# EAGLE board aps_batt_board (EAGLE 4.13)
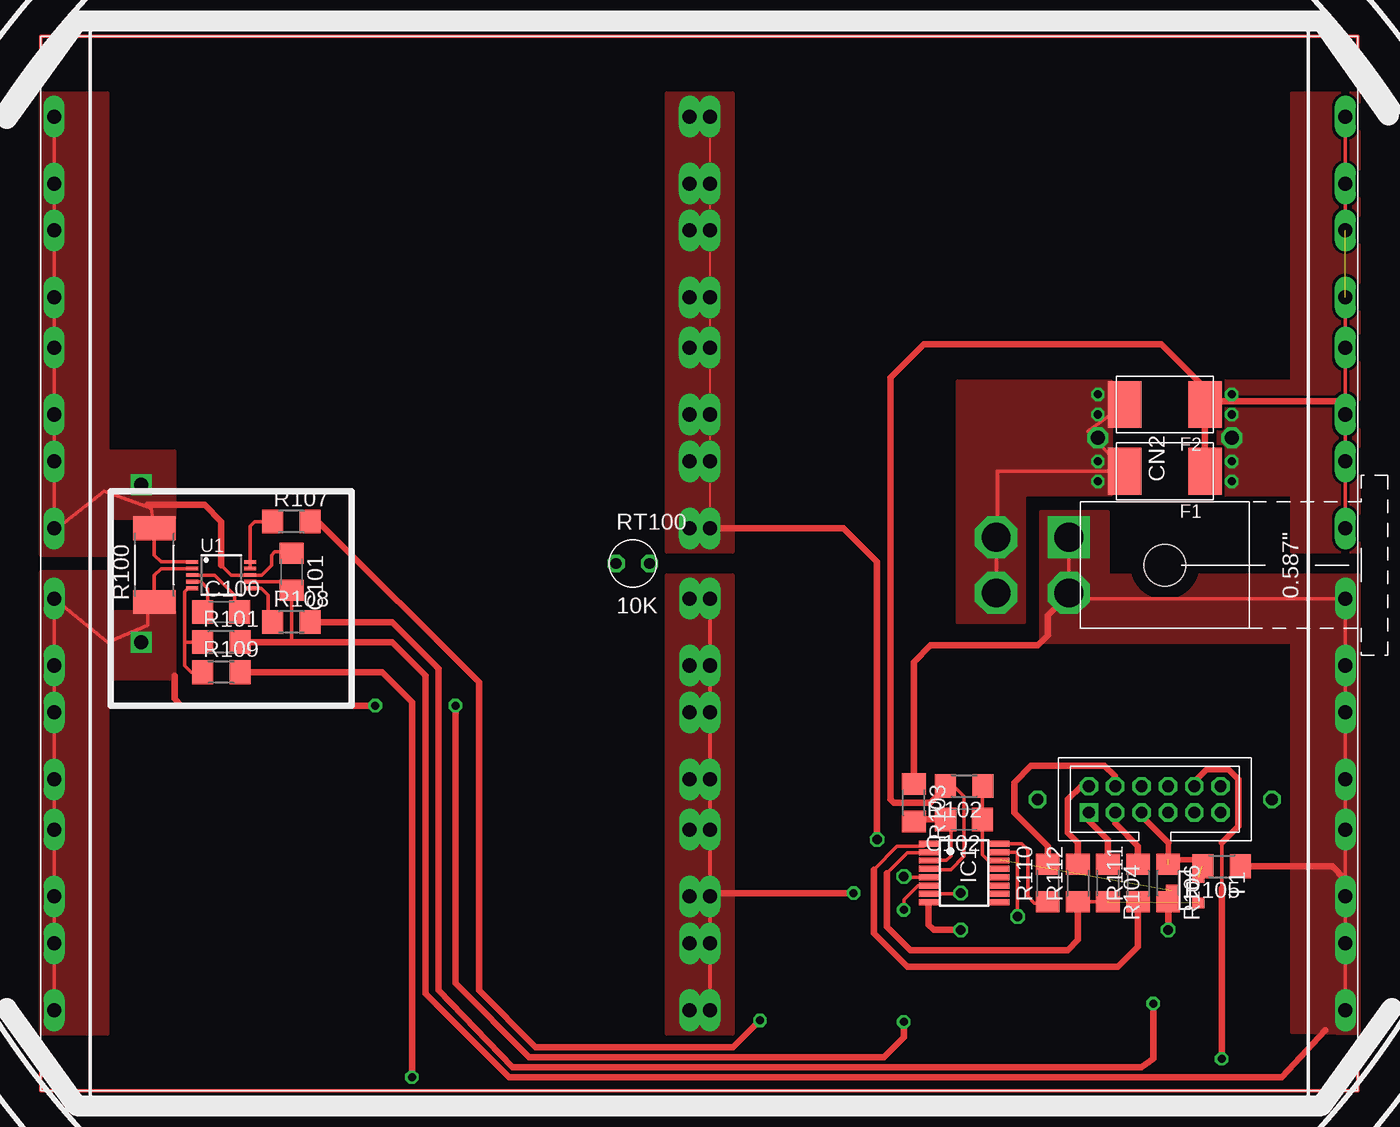
[diagram p0: board, top side]
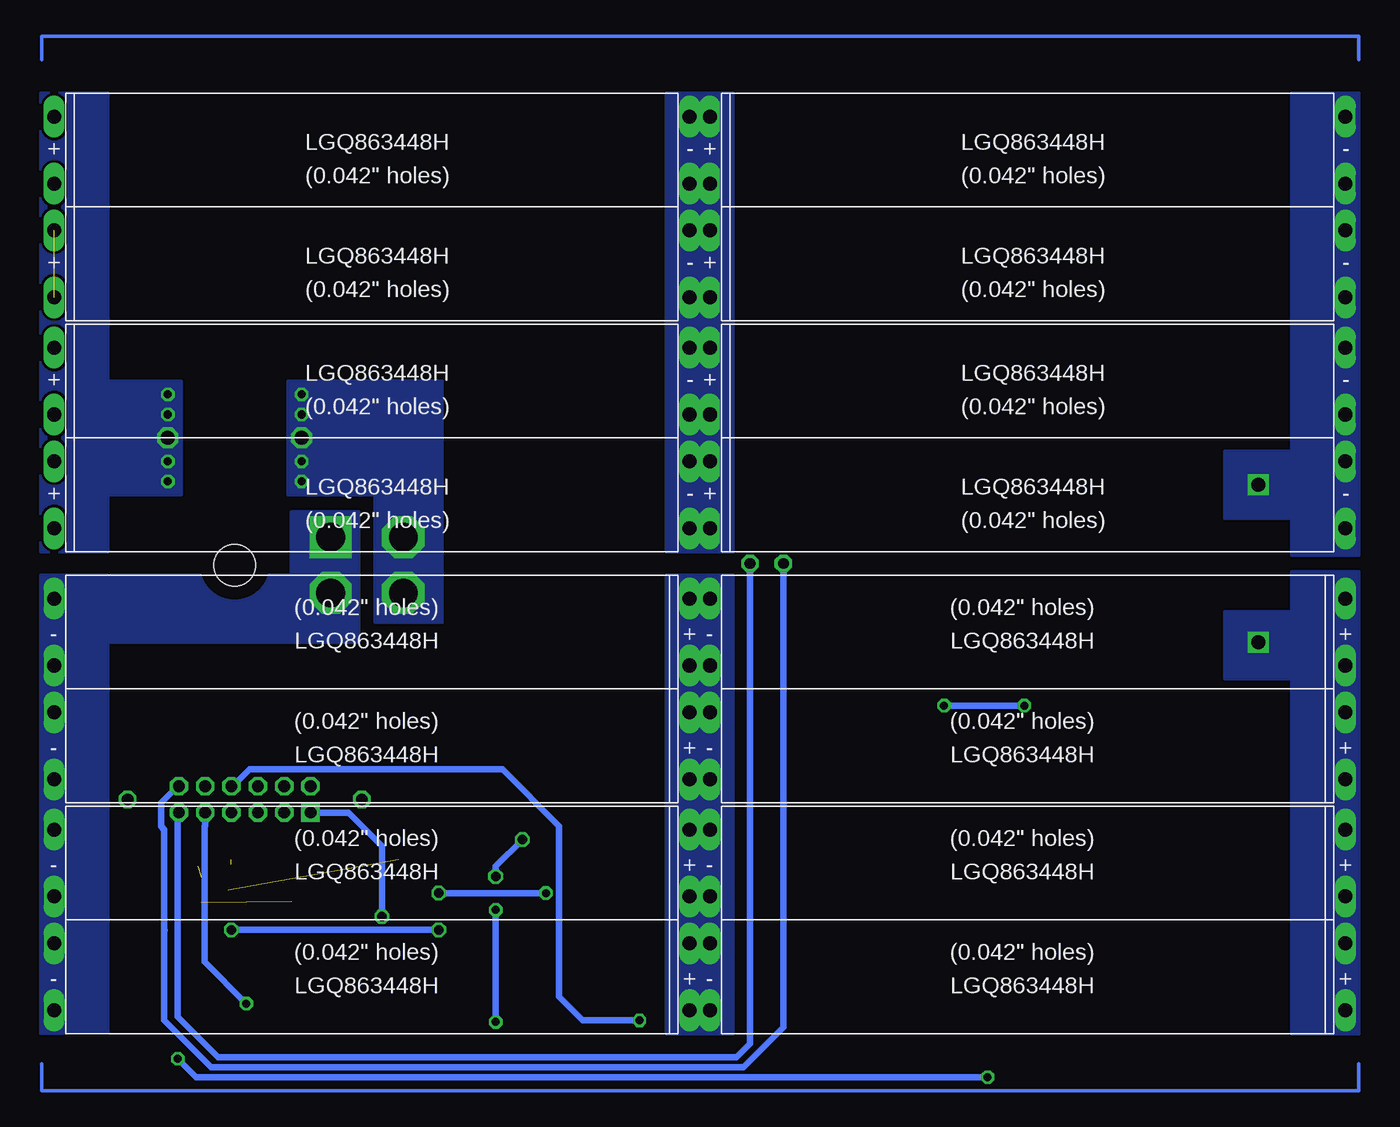
[diagram p1: board, bottom side, seen from below]

No outline drawn. Coordinates in mm, seen from the top.
Copper layers (1*16): Top 0.035mm / dielectric 1.5mm / Bottom 0.035mm
Design rules "default": minimum track width 10mil, minimum drill 24mil, track to track 8mil, track to pad 8mil, pad to pad 8mil, via to via 8mil, smd to smd 8mil, copper to edge 40mil, drill to drill 8mil, minimum pad ring 10mil, minimum via ring 8mil, stop-mask expansion 4mil, vias tented up to drill 0mil, thermal gap 10mil

## Footprints (pad centres in the part's own frame; a part is rotated, then mirrored left to right if it is on the bottom)
LGQ863448H-LI-ION-CELL = drill 1.067 long: P$1 -24.13,2.54; P$2 -24.13,-2.54; P$3 24.13,2.54; P$4 24.13,-2.54
C1206 = smd 1.6 x 1.8: 1 -1.4,0; 2 1.4,0
2MM-2X6-SHROUDED-HEADER = drill 0.889 pad 1.321 square: 1 -5,-1 | drill 0.889 pad 1.321 octagon: 2 -5,1; 3 -3,-1; 4 -3,1; 5 -1,-1; 6 -1,1; 7 1,-1; 8 1,1; 9 3,-1; 10 3,1; 11 5,1; 12 5,-1
CONN_MINIFIT_HEADER_RT = drill 2.184 square: 1 2.108,7.29 | drill 2.184 octagon: 2 -2.108,7.29; 3 2.108,12.802; 4 -2.108,12.802 | hole 3.175: 0,0
SFT_SMT_FUSE = smd 2.54 x 3.556: P$3 -3.048,0; P$4 3.048,0
QSOP16 = smd 0.45 x 1.5: 1 -2.223,-2.69; 2 -1.587,-2.69; 3 -0.953,-2.69; 4 -0.318,-2.69; 5 0.318,-2.69; 6 0.953,-2.69; 7 1.587,-2.69; 8 2.223,-2.69; 9 2.223,2.69; 10 1.587,2.69; 11 0.953,2.69; 12 0.318,2.69; 13 -0.318,2.69; 14 -0.953,2.69; 15 -1.587,2.69; 16 -2.223,2.69
R2512 = smd 1.8 x 3.2: 1 -2.8,0; 2 2.8,0
R1206 = smd 1.6 x 1.803: 1 -1.422,0; 2 1.422,0
THERMISTER_LEADED = drill 0.813 octagon: P$1 -1.27,0; P$2 1.27,0
SOT-23 = smd 0.787 x 0.889: 1 0.025,-1.016; 2 -0.94,1.016; 3 0.991,1.016
LTMSOP10 = smd 0.279 x 0.9: 1 -1,-2.2; 2 -0.5,-2.2; 3 0,-2.2; 4 0.5,-2.2; 5 1,-2.2; 6 1,2.2; 7 0.5,2.2; 8 0,2.2; 9 -0.5,2.2; 10 -1,2.2

## Placement (x,y rotation side)
B100.1  BATTERY_LI_ION_LCQ863448H  [LGQ863448H-LI-ION-CELL]  74.93,8.64 180 bottom
B100.2  BATTERY_LI_ION_LCQ863448H  [LGQ863448H-LI-ION-CELL]  74.93,17.27 180 bottom
B100.3  BATTERY_LI_ION_LCQ863448H  [LGQ863448H-LI-ION-CELL]  74.93,26.16 180 bottom
B100.4  BATTERY_LI_ION_LCQ863448H  [LGQ863448H-LI-ION-CELL]  74.93,34.8 180 bottom
B101.1  BATTERY_LI_ION_LCQ863448H  [LGQ863448H-LI-ION-CELL]  25.15,34.8 180 bottom
B101.2  BATTERY_LI_ION_LCQ863448H  [LGQ863448H-LI-ION-CELL]  25.15,26.16 180 bottom
B101.3  BATTERY_LI_ION_LCQ863448H  [LGQ863448H-LI-ION-CELL]  25.15,17.27 180 bottom
B101.4  BATTERY_LI_ION_LCQ863448H  [LGQ863448H-LI-ION-CELL]  25.15,8.64 180 bottom
B102.1  BATTERY_LI_ION_LCQ863448H  [LGQ863448H-LI-ION-CELL]  25.15,45.21 0 bottom
B102.2  BATTERY_LI_ION_LCQ863448H  [LGQ863448H-LI-ION-CELL]  25.15,53.85 0 bottom
B102.3  BATTERY_LI_ION_LCQ863448H  [LGQ863448H-LI-ION-CELL]  25.15,62.74 0 bottom
B102.4  BATTERY_LI_ION_LCQ863448H  [LGQ863448H-LI-ION-CELL]  25.15,71.37 0 bottom
B103.1  BATTERY_LI_ION_LCQ863448H  [LGQ863448H-LI-ION-CELL]  74.93,45.21 0 bottom
B103.2  BATTERY_LI_ION_LCQ863448H  [LGQ863448H-LI-ION-CELL]  74.93,53.85 0 bottom
B103.3  BATTERY_LI_ION_LCQ863448H  [LGQ863448H-LI-ION-CELL]  74.93,62.74 0 bottom
B103.4  BATTERY_LI_ION_LCQ863448H  [LGQ863448H-LI-ION-CELL]  74.93,71.37 0 bottom
C100  4.7u  [C1206]  13.72,36.32 0 top
C101  4.7u  [C1206]  19.05,39.37 270 top
C102  100n 50V  [C1206]  70.1,20.57 180 top
CN1  [2MM-2X6-SHROUDED-HEADER]  84.58,22.1 0 top
CN2  CONN_MINIFIT_4POS_HEADER_RT_ANGLE  [CONN_MINIFIT_HEADER_RT]  85.34,39.88 90 top
F1  10A  [SFT_SMT_FUSE]  85.34,46.99 180 top
F2  10A  [SFT_SMT_FUSE]  85.34,52.07 180 top
IC1  [QSOP16]  70.1,16.51 270 top
R100  0.01 1W  [R2512]  8.64,39.88 90 top
R101  1M  [R1206]  13.72,34.04 0 top
R102  115k  [R1206]  70.1,23.11 180 top
R103  1k  [R1206]  66.29,21.84 270 top
R104  1M  [R1206]  81.03,15.75 270 top
R105  20.0k  [R1206]  89.66,17.02 180 top
R106  61.9k  [R1206]  85.6,15.75 270 top
R107  1k  [R1206]  19.05,43.18 0 top
R108  1k  [R1206]  19.05,35.56 0 top
R109  4.7k  [R1206]  13.72,31.75 0 top
R110  4.7k  [R1206]  76.45,15.75 90 top
R111  4.7k  [R1206]  83.31,15.75 90 top
R112  4.7k  [R1206]  78.74,15.75 90 top
RT100  10K  [THERMISTER_LEADED]  44.96,40.01 0 top
T1  ZXMN2A01F  [SOT-23]  86.87,15.24 270 top
U1  IC_LTC4150-  [LTMSOP10]  13.72,39.12 270 top

## Library data of the parts
B100.1-B100.4 B101.1-B101.4 B102.1-B102.4 B103.1-B103.4 = psas_eagle_library_1.10
C100-C102 R100-R112 = rcl
CN1 CN2 F1 F2 IC1 RT100 U1 = psas_eagle_library
T1 = zetex

## Nets
B+: B103.1.P$1 B103.1.P$2 B103.2.P$1 B103.2.P$2 B103.3.P$1 B103.3.P$2 B103.4.P$1 B103.4.P$2 F1.P$3 F2.P$3 IC1.4 R102.2
BAT+: CN2.3 CN2.4 F1.P$4 F2.P$4
CC_PULSE: CN1.8 R107.2
CC_SD\: CN1.10 R109.2
CC_SIGN: CN1.9 R108.2
DIGITAL_GND: CN1.1 IC1.15 R104.1
N$1: B100.1.P$1 B100.1.P$2 B100.2.P$1 B100.2.P$2 B100.3.P$1 B100.3.P$2 B100.4.P$1 B100.4.P$2 B101.1.P$3 B101.1.P$4 B101.2.P$3 B101.2.P$4 B101.3.P$3 B101.3.P$4 B101.4.P$3 B101.4.P$4 IC1.7
N$2: B102.1.P$1 B102.1.P$2 B102.2.P$1 B102.2.P$2 B102.3.P$1 B102.3.P$2 B102.4.P$1 B102.4.P$2 B103.1.P$3 B103.1.P$4 B103.2.P$3 B103.2.P$4 B103.3.P$3 B103.3.P$4 B103.4.P$3 B103.4.P$4 IC1.5
N$3: B101.1.P$1 B101.1.P$2 B101.2.P$1 B101.2.P$2 B101.3.P$1 B101.3.P$2 B101.4.P$1 B101.4.P$2 IC1.6 R100.1 U1.2
N$4: B102.1.P$3 B102.1.P$4 B102.2.P$3 B102.2.P$4 B102.3.P$3 B102.3.P$4 B102.4.P$3 B102.4.P$4 C101.1 R100.2 U1.1 U1.8
N$7: IC1.8 R106.2
N$9: C100.2 U1.3
N$10: C100.1 U1.4
N$13: R107.1 U1.9 U1.10
N$14: R108.1 U1.6
N$15: R101.1 R109.1 U1.5
N$16: C102.1 IC1.14 R102.1 T1.1
N$17: C102.2 IC1.3 R103.2
N$20: IC1.1 R111.1
N$21: IC1.16 R110.1
N$22: IC1.2 R104.2 R112.1 T1.3
THERM1: CN1.11 RT100.P$1
THERM2: CN1.12 RT100.P$2
TRIANGLE_GND: B100.1.P$3 B100.1.P$4 B100.2.P$3 B100.2.P$4 B100.3.P$3 B100.3.P$4 B100.4.P$3 B100.4.P$4 C101.2 CN2.1 CN2.2 R101.2 R103.1 R105.1 U1.7
VBAT: CN1.5 R105.2 R106.1 T1.2
VBAT_A0: CN1.3 R111.2
VBAT_A1: CN1.4 R110.2
VBAT_EN: CN1.2 R112.2

## Tracks (layer width: path | path; a pad name or v marks a point on that pad's centre or on a via)
B+  (1 unrouted)
  Top 0.254: B103.4.P$2 99.06,68.58 | B103.4.P$2 B103.4.P$1 | B103.3.P$1 B103.4.P$2 | B103.2.P$1 99.06,56.13 | B103.2.P$1 B103.3.P$2 | B103.2.P$2 99.06,51.05 | B103.2.P$2 99.06,52.07 B103.2.P$1 | B103.2.P$2 B103.1.P$1 B103.1.P$2 | IC1.4 67.5,16.83 67.56,16.76 69.09,16.76 70.1,17.78 70.1,22.35 69.34,23.11 68.83,23.11 R102.2 | 88.65,53.09 88.65,52.32 F2.P$3
  Top 0.508: 88.65,53.09 85.09,56.64 67.06,56.64 64.52,54.1 64.52,22.1 64.77,21.84 67.56,21.84 68.83,23.11 | 88.39,52.32 F2.P$3 F1.P$3 | 88.65,52.32 99.06,52.32 99.06,52.07
BAT+  (via drill 0.61, 1.07)
  Top 0.254: F2.P$4 79.5,50.04 F1.P$4 72.64,46.99 72.64,41.91 72.57,41.99 CN2.3 72.47,41.99 72.39,41.91 72.54,41.76 CN2.4
  other vias: 80.26,49.53 80.26,52.83 80.26,51.31 80.26,47.75 80.26,46.23
  pour Top (isolate 0.254, no thermals): 81.28,45.21 74.68,45.21 74.68,35.56 69.6,35.56 69.6,53.85 81.28,53.85
  pour Bottom (isolate 0.254, no thermals): 81.28,53.85 69.6,53.85 69.6,35.56 74.68,35.56 74.68,45.21 81.28,45.21
CC_PULSE  (via drill 0.61)
  Top 0.508: R107.2 21.08,43.18 33.27,30.99 33.27,7.62 37.59,3.3 52.58,3.3 v54.61,5.33
  Bottom 0.508: CN1.8 85.49,23.1 84.2,24.38 65.02,24.38 60.71,20.07 60.71,7.11 58.93,5.33 v54.61,5.33
CC_SD\  (via drill 0.61)
  Top 0.254: 89.66,15.37 89.66,18.8
  Top 0.508: R109.2 25.91,31.75 28.19,29.46 v28.19,1.02 | CN1.10 87.58,23.45 88.52,24.38 90.17,24.38 90.93,23.62 90.93,20.07 89.66,18.8 | v89.66,2.41 89.66,15.37
  Bottom 0.508: v28.19,1.02 88.27,1.02 v89.66,2.41
CC_SIGN  (via drill 0.61)
  Top 0.508: R108.2 26.67,35.56 30.23,32 30.23,7.62 35.81,1.78 83.57,1.78 84.45,2.41 v84.45,6.6
  Bottom 0.508: CN1.9 87.58,20.11 87.63,20.07 87.63,9.78 v84.45,6.6
DIGITAL_GND  (via drill 0.71)
  Top 0.254: IC1.15 74.11,18.1 74.17,18.03 v74.17,13.21
  Top 0.508: CN1.1 79.58,20.49 81.03,19.05 R104.1 81.03,17.02
  Bottom 0.254: 79.5,21.08 79.52,21.1 CN1.1
  Bottom 0.508: v74.17,13.21 74.17,18.54 76.71,21.08 79.76,21.08 79.74,21.1 CN1.1
N$1  (via drill 0.61, 0.71)
  Top 0.254: B100.4.P$2 51.05,37.34 | B100.4.P$2 B101.1.P$4 | B100.4.P$1 B100.4.P$2 | B100.4.P$1 B101.1.P$3 | B100.3.P$2 50.8,28.19 | B100.3.P$2 B100.4.P$1 | B100.3.P$1 50.8,23.37 | B100.3.P$1 B100.3.P$2 | B100.3.P$2 B101.2.P$4 | B100.3.P$1 B101.2.P$3 | B100.2.P$2 B100.3.P$1 | B100.2.P$2 B101.3.P$4 | B100.2.P$1 B100.2.P$2 | B100.2.P$1 B101.3.P$3 | B100.1.P$2 B100.2.P$1 | B100.1.P$2 B100.1.P$1 B101.4.P$3 | 49.02,11.18 B101.4.P$4 B100.1.P$2 | IC1.7 69.79,14.92 v69.85,14.99
  Top 0.508: v61.72,14.99 51.05,14.99 B100.2.P$1
  Bottom 0.508: v61.72,14.99 v69.85,14.99
  pour Top (no thermals): 47.5,39.12 52.58,39.12 52.58,4.32 47.5,4.32
  pour Bottom (no thermals): 47.5,39.12 52.58,39.12 52.58,4.32 47.5,4.32
N$2  (via drill 0.71)
  Top 0.127: B103.4.P$3 51.05,73.91 | B103.4.P$3 B102.4.P$1 | B103.4.P$4 B103.4.P$3 | B103.4.P$4 B102.4.P$2 | B103.3.P$3 50.8,65.02 | B103.3.P$3 B103.4.P$4 | B103.3.P$3 B102.3.P$1 | B103.3.P$4 50.55,60.2 50.8,60.45 B103.3.P$3 | 49.02,60.2 B102.3.P$2 B103.3.P$4 | B103.2.P$3 50.8,56.13 | B103.2.P$3 B103.3.P$4 | B103.2.P$3 B102.2.P$1 | B103.1.P$3 50.8,47.5 | B103.1.P$3 B103.2.P$4 | B103.2.P$4 B103.2.P$3 | B103.2.P$4 B102.2.P$2 | B103.1.P$3 51.05,47.75 | B103.1.P$3 B102.1.P$1 | B103.1.P$3 B103.1.P$4 B102.1.P$2 49.02,42.67
  Top 0.254: IC1.5 65.72,16.19 v65.53,16.26
  Top 0.508: B103.1.P$4 60.96,42.67 63.5,40.13 v63.5,19.05
  Bottom 0.508: v65.53,16.26 65.53,17.02 v63.5,19.05
  pour Bottom (no thermals): 47.5,75.69 52.58,75.69 52.58,40.89 47.5,40.89
  pour Top (no thermals): 52.58,40.89 47.5,40.89 47.5,75.69 52.58,75.69
N$3  (via drill 0.61, 1.07)
  Top 0.254: B101.4.P$1 B101.4.P$2 B101.3.P$1 | B101.3.P$1 1.02,14.99 | B101.2.P$1 1.02,23.88 | B101.2.P$1 B101.3.P$2 B101.3.P$1 | B101.2.P$1 B101.2.P$2 B101.1.P$1 B101.1.P$2 5.08,34.04 8.13,35.31 8.13,37.08 7.37,37.08 R100.1 8.64,39.12 9.14,39.62 U1.2 | IC1.6 66.61,15.56 65.53,14.48 v65.53,13.72
  Top 0.508: 10.16,31.5 10.16,29.72 10.67,29.21 v25.4,29.21 | v31.5,29.21 31.5,8.13 37.08,2.54 64.01,2.54 65.53,4.06 v65.53,5.21
  Bottom 0.508: v31.5,29.21 v25.4,29.21 | v65.53,5.21 v65.53,13.72
  other vias: 7.62,34.04
  pour Top (isolate 0.254, no thermals): 0,39.37 5.08,39.37 5.08,4.32 0,4.32
  pour Bottom (isolate 0.254, no thermals): 0,39.37 5.08,39.37 5.08,4.32 0,4.32
  pour Top (isolate 0.254, no thermals): 5.08,36.32 10.16,36.32 10.16,31.24 5.08,31.24
  pour Bottom (isolate 0.254, no thermals): 5.08,36.32 10.16,36.32 10.16,31.24 5.08,31.24
N$4  (via drill 1.07)
  Top 0.254: B102.4.P$4 1.02,68.58 | B102.4.P$4 B102.4.P$3 | B102.3.P$3 1.02,65.02 | B102.3.P$3 B102.4.P$4 | B102.3.P$3 B102.3.P$4 B102.2.P$3 B102.2.P$4 | B102.2.P$4 1.02,51.05 | B102.1.P$3 1.02,47.24 | B102.1.P$3 B102.2.P$4 | B102.1.P$3 B102.1.P$4 1.27,42.67 1.28,42.68 4.83,45.47 8.08,44.3 | 8.08,44.3 8.38,44.2 R100.2 8.64,40.64 9.16,40.12 U1.1 | 13.72,39.88 14.48,39.12 U1.8 16.76,39.12 17.53,39.88 17.53,40.64 17.78,40.89 18.8,40.89 19.05,40.64 C101.1 | 8.13,44.45 8.08,44.4 8.08,44.3
  Top 0.508: 13.72,39.88 13.72,43.18 12.45,44.45 8.13,44.45
  other vias: 7.62,45.97
  pour Top (isolate 0.254, no thermals): 0,75.69 5.08,75.69 5.08,40.64 0,40.64
  pour Bottom (isolate 0.254, no thermals): 0,75.69 5.08,75.69 5.08,40.64 0,40.64
  pour Top (isolate 0.254, no thermals): 5.08,43.43 10.16,43.43 10.16,48.51 5.08,48.51
  pour Bottom (isolate 0.254, no thermals): 5.08,48.51 10.16,48.51 10.16,43.43 5.08,43.43
N$5  (via drill 0.61, 1.07)
  other vias: 90.42,51.31 90.42,52.83 90.42,47.75 90.42,46.23 90.42,49.53
  pour Bottom (no thermals): 95,75.69 100.08,75.69 100.08,40.89 95,40.89
  pour Top (no thermals): 100.08,40.89 95,40.89 95,75.69 100.08,75.69
  pour Top (no thermals): 89.41,53.85 95,53.85 95,45.21 89.41,45.21
  pour Bottom (no thermals): 89.41,53.85 95,53.85 95,45.21 89.41,45.21
N$7  (via drill 0.71)
  Top 0.508: IC1.8 67.41,12.6 67.82,12.19 v69.85,12.19 | v85.6,12.19 R106.2
  Bottom 0.508: v69.85,12.19 v85.6,12.19
N$9
  Top 0.254: U1.3 13.21,39.12 14.73,37.59 14.73,36.58 14.99,36.32 C100.2
N$10
  Top 0.254: U1.4 12.18,38.62 12.7,38.1 12.7,36.83 12.32,36.45 C100.1
N$11  (via drill 0.89)
  other vias: 93.47,22.1
N$12  (via drill 0.89)
  other vias: 75.69,22.1
N$13
  Top 0.254: 15.99,40.12 16,40.13 | 15.99,40.12 U1.10 15.92,42.84 16.26,43.18 R107.1 | U1.9 15.92,40.05 15.99,40.12
N$14
  Top 0.254: U1.6 16.75,38.12 17.27,37.59 17.27,35.81 17.53,35.56 R108.1
N$15
  Top 0.254: U1.5 11.19,38.12 10.92,37.85 10.92,34.04 | R101.1 12.29,34.19 12.19,34.29 11.94,34.04 10.92,34.04 | 10.92,34.04 10.92,32.26 11.43,31.75 R109.1
N$16  (1 unrouted)
  Top 0.254: IC1.14 72.83,17.46 72.9,17.53 71.88,17.53 71.5,17.9 C102.1 71.5,22.48 71.63,22.61 71.63,23.11 R102.1
N$17
  Top 0.254: IC1.3 68.77,17.46 69.09,17.78 69.09,20.32 68.83,20.57 C102.2
  Top 0.508: R103.2 66.29,20.57 C102.2
N$18
  Bottom 0.254: 0,78.23 0,80.01 100,80.01 100,78.23
N$19
  Top 0.254: 0,78.23 0,80.01 100,80.01 100,78.23
N$20
  Top 0.254: 63.25,16.76 65.02,18.54 67.06,18.54 67.31,18.8 67.37,18.73 IC1.1
  Top 0.508: R111.1 83.31,10.92 81.79,9.4 65.79,9.4 63.25,11.94 63.25,16.76
N$21
  Top 0.254: IC1.16 74.49,18.73 74.93,18.29 74.93,14.73 75.44,14.22 76.2,14.22 76.45,14.48 R110.1
N$22  (1 unrouted)
  Top 0.254: R112.1 78.74,14.22 78.84,14.33 R104.2 | 64.26,16.51 65.79,18.03 67.56,18.03 67.5,18.1 IC1.2
  Top 0.508: R112.1 78.74,11.43 77.98,10.67 66.04,10.67 64.26,12.45 64.26,16.51
N$23
  Top 0.254: 0,2.03 0,0 100,0 100,2.03
N$24
  Bottom 0.254: 0,2.03 0,0 100,0 100,2.03
THERM1
  Bottom 0.508: RT100.P$1 43.69,4.83 46.74,1.78 87.12,1.78 90.68,5.33 90.68,12.19 | 90.68,12.19 90.66,12.18 | 90.68,12.19 90.68,19.81 90.93,20.07 90.93,21.84 89.66,23.11 89.65,23.1 CN1.11
THERM2
  Bottom 0.508: RT100.P$2 46.23,3.56 47.24,2.54 86.61,2.54 89.66,5.59 89.66,11.68 89.68,12.21 89.68,20.84 89.66,21.08 89.65,21.1 CN1.12
TRIANGLE_GND
  Top 0.254: B100.1.P$4 99.06,11.43 | B100.1.P$4 B100.1.P$3 | B100.1.P$4 B100.2.P$3 99.06,16 B100.2.P$4 | B100.2.P$4 99.06,20.07 | B100.3.P$3 99.06,23.88 | B100.3.P$3 B100.2.P$4 | B100.3.P$4 99.06,28.96 | B100.3.P$4 B100.3.P$3 | B100.3.P$4 B100.4.P$3 B100.4.P$4 78.23,37.34 77.98,37.59 | CN2.1 77.98,41.91 78.05,41.83 CN2.2 | 19.05,34.04 C101.2 19.05,38.1 18.53,38.62 U1.7 | B100.3.P$3 99.31,23.62
  Top 0.508: R101.2 19.05,34.04 26.67,34.04 29.21,31.5 29.21,7.37 35.56,1.02 94.23,1.02 97.54,4.57 | R103.1 66.29,23.88 | 66.29,23.88 66.29,24.38 | CN2.2 78.05,37.67 77.98,37.59 76.45,36.07 76.45,34.54 75.69,33.78 67.56,33.78 66.29,32.51 66.29,23.88 | R105.1 98.04,17.02 99.06,16
  pour Top (no thermals): 100.08,39.12 95,39.12 95,4.45 100.08,4.32
  pour Bottom (no thermals): 95,39.12 100.08,39.12 100.08,4.32 95,4.45
  pour Top (no thermals): 95,39.12 81.03,39.12 81.03,43.94 75.95,43.94 75.95,34.04 94.74,34.04 94.74,39.12
  pour Bottom (isolate 0.254, no thermals): 94.74,39.12 81.03,39.12 81.03,43.94 75.95,43.94 75.95,34.04 94.74,34.04
VBAT  (2 unrouted)
  Top 0.406: 85.6,18.8 85.6,17.53 88.14,17.53 88.14,17.02 R105.2
  Top 0.508: CN1.5 83.58,20.81 85.6,18.8
VBAT_A0
  Top 0.508: CN1.3 81.58,20.27 83.31,18.54 R111.2
VBAT_A1
  Top 0.508: R110.2 76.45,18.54 73.91,21.08 73.91,23.37 75.18,24.64 80.77,24.64 81.53,23.88 81.53,23.11 81.55,23.1 CN1.4
VBAT_EN
  Top 0.508: R112.2 78.74,18.8 77.98,19.56 77.98,22.1 78.99,23.11 80.01,23.11 79.99,23.1 CN1.2